# Altium PCB pcb.PcbDoc
Units mm, origin at the board's own origin, x right, y up, seen from the top; angles counter-clockwise.
Board outline 60 x 195 mm, 2 copper layers (Top Layer, Bottom Layer), stack 1.571 mm thick; 55 components, 30 nets, 192 pads, 0 vias.
Unrouted connection lines stored in the file: 111.
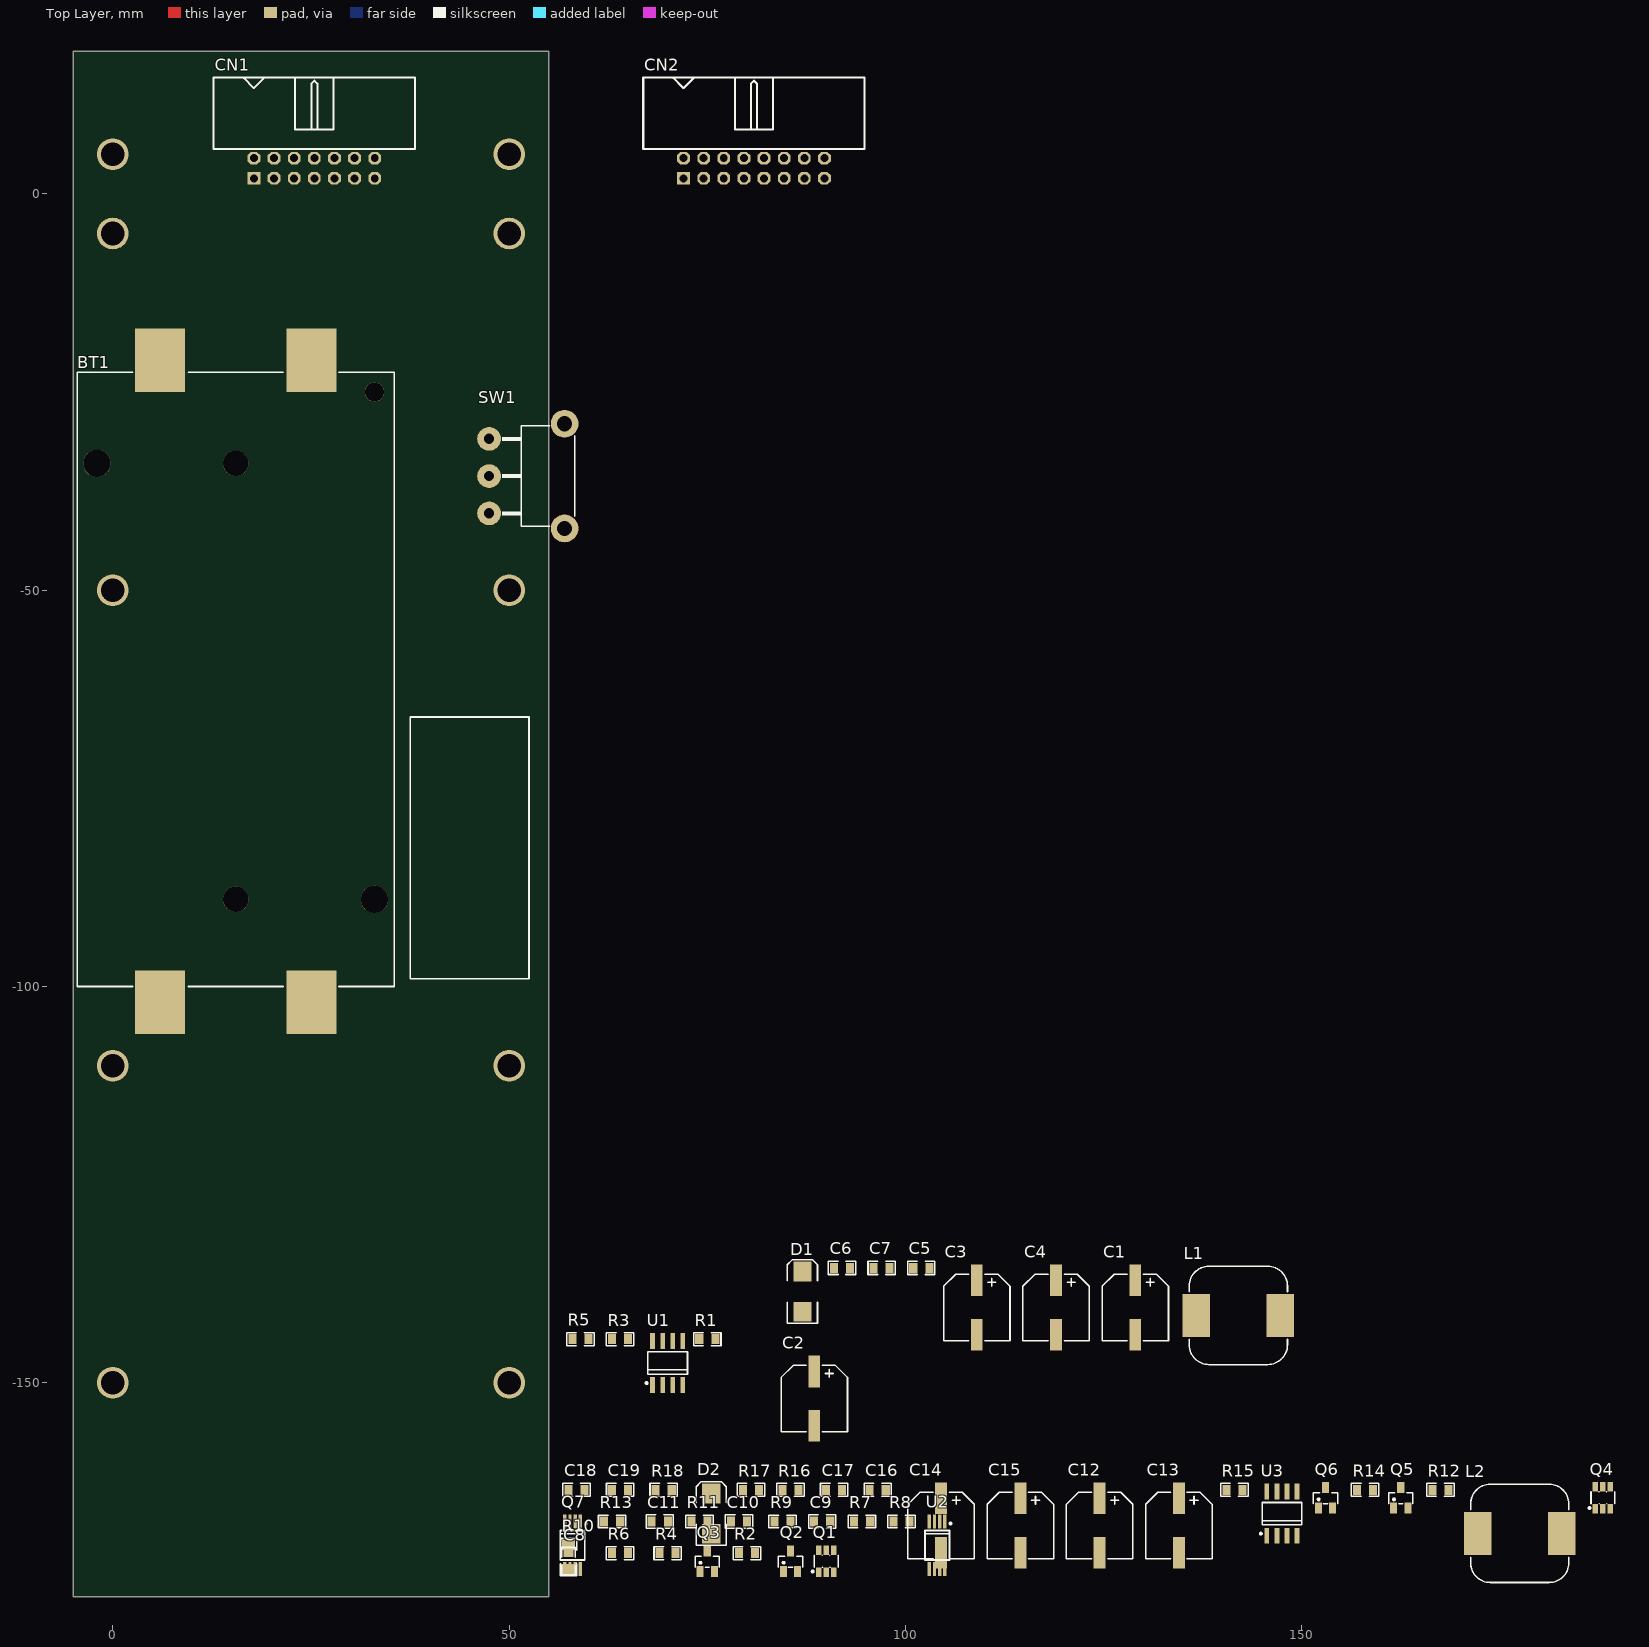
[diagram p0: Top Layer view]
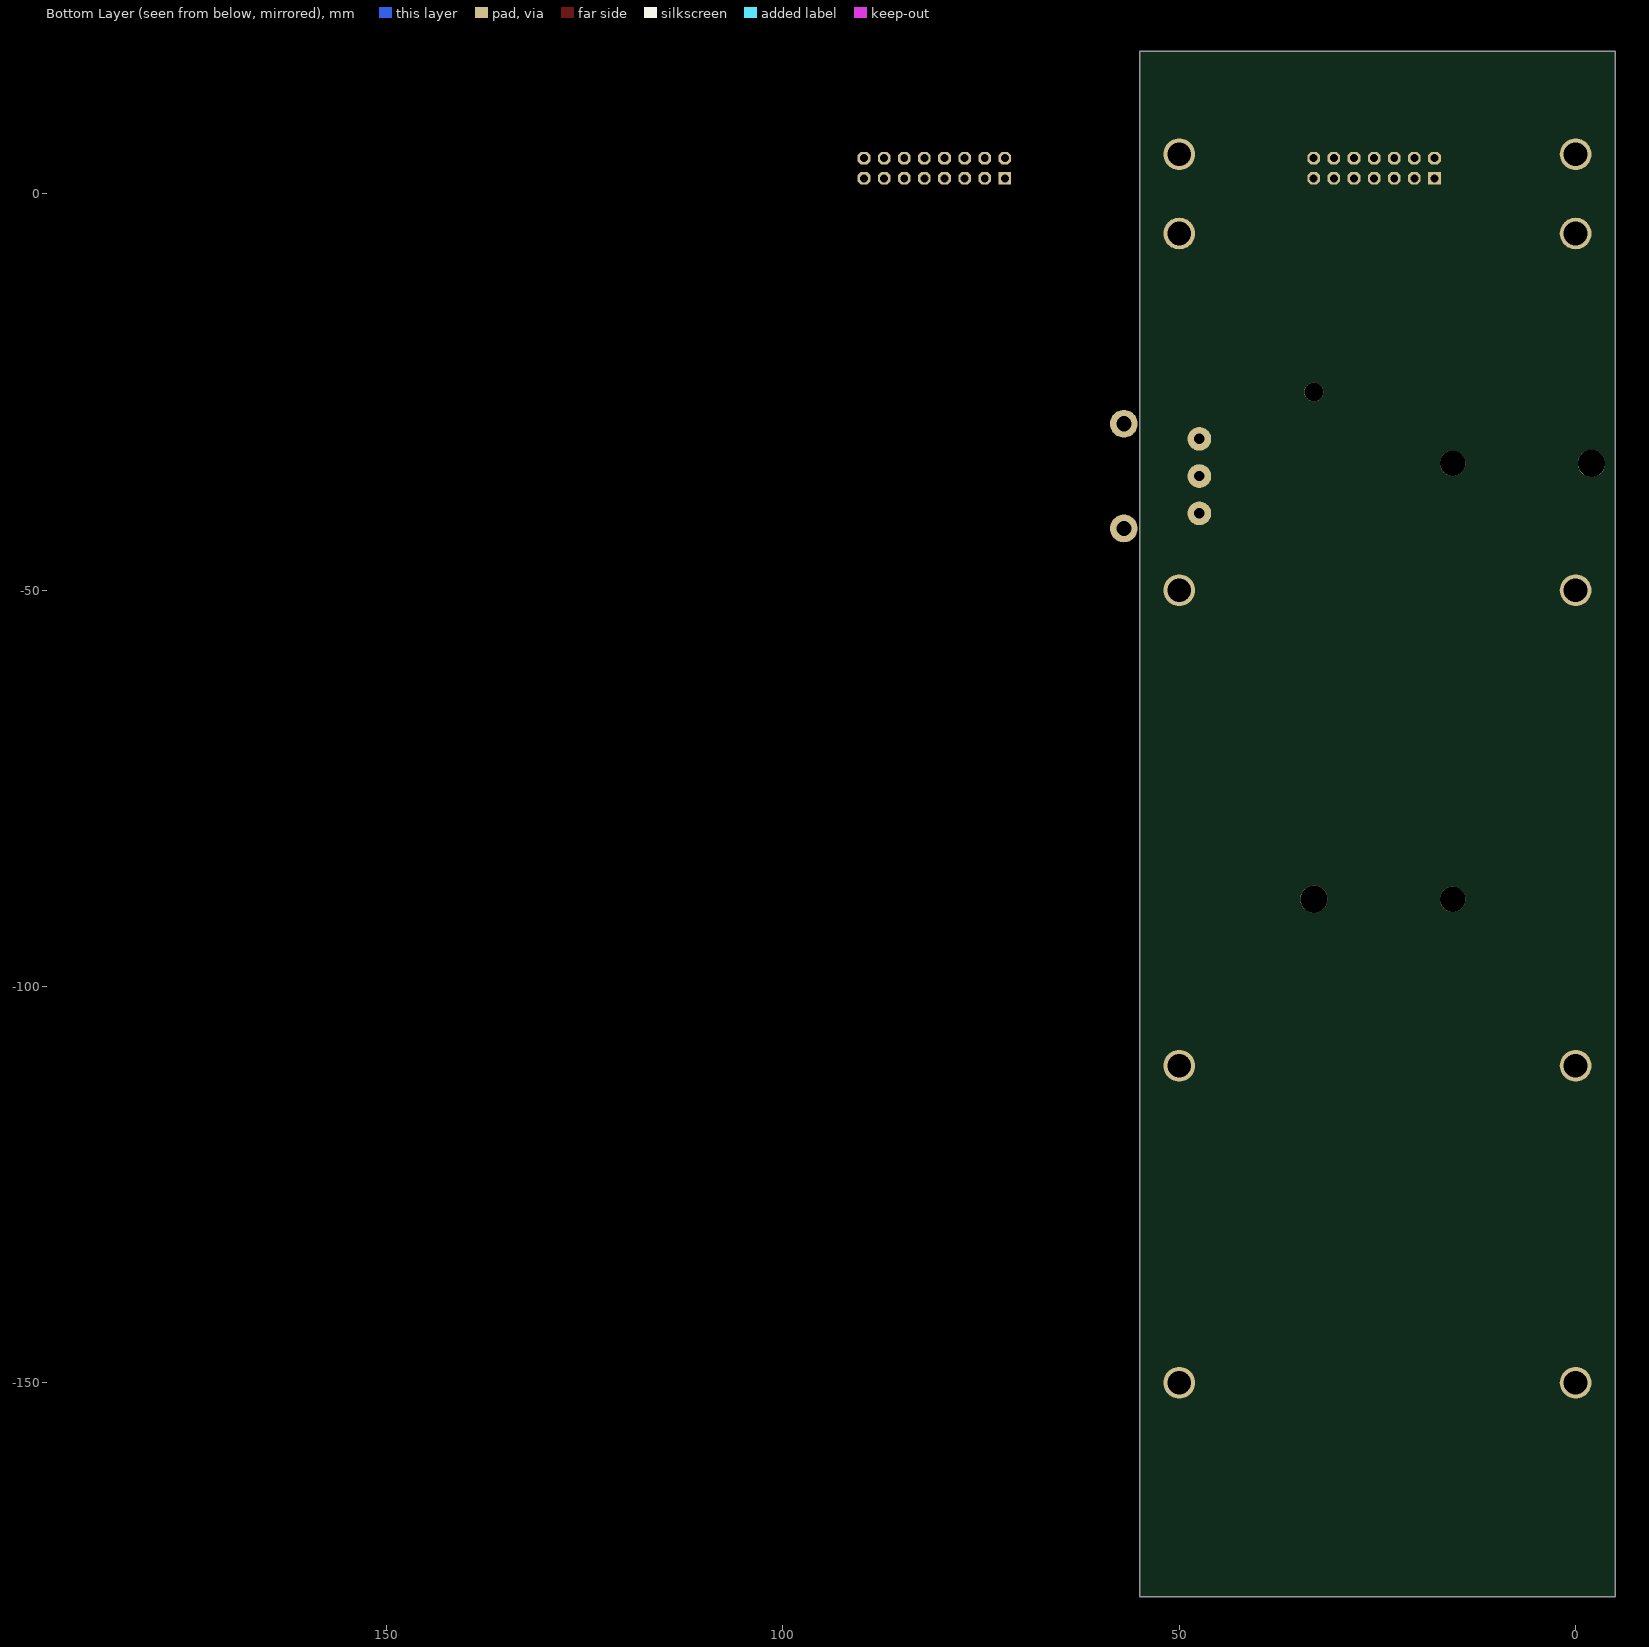
[diagram p1: Bottom Layer view, seen from below]

## Layer stack, top to bottom
Top Solder: solder mask 0.0102, Solder Resist, Dk 3.5
Top Layer: signal copper 0.0356
Dielectric 1: dielectric 1.5, FR-4, Dk 4.8
Bottom Layer: signal copper 0.0356
Bottom Solder: solder mask 0.0102, Solder Resist, Dk 3.5

## Board outline
-5,-177 -5,18 55,18 55,-177

## Design rules (kind name [scope] priority, off if disabled: settings)
Clearance [All] p1: gap=0.254 ignorepadtopadclearanceinfootprint=FALSE except(0: Arc-Hole Track-Hole SMDPad-Hole THPad-Hole Via-Hole Fill-Hole Poly-Hole Region-Hole Text-Hole)
PolygonConnect [All] p1: connectstyle=Relief reliefconductorwidth=0.254 reliefentries=4 polygonreliefangle="90 Angle" airgapwidth=0.254
RoomDefinition sch [InComponentClass('sch')] p1: confinementstyle=ConfineIn formatcopy=TRUE lockcomponents=FALSE outline -10,-160 113.26,-160 113.26,14 -10,14
RoutingVias [All] p1: holewidth=0.711 width=1.27 viastyle="Through Hole" minholewidth=0.711 minwidth=1.27 maxholewidth=0.711 maxwidth=1.27
SolderMaskExpansion [All] p1: expansion=0.102
Width [All] p1: maxlimit=0.254 minlimit=0.254 preferedwidth=0.254
30 further rules are at their usual default settings.

## Classes and differential pairs
component class sch: BT1 C1 C2 C3 C4 C5 C6 C7 C8 C12 C13 C14 C15 C16 C17 C18 C19 CN1 CN2 D1 D2 L1 L2 Q1 Q2 Q3 Q4 Q5 Q6 Q7 R1 R2 R3 R4 R5 R6 R12 R13 R14 R15 R16 R17 R18 SW1 U1 U3

## Components (designator, comment, footprint, x,y, rotation, side; value= is the part's Value field where it differs from the comment)
BT1 "KEYSTONE 1048" KEYSTONE_1048 15.505,-61.5 r90 top
C1 "220uF/16V" CES_E_8.3x8.3_6.2 129,-140.5 r0 top
C2 "220uF/16V" CES_E_8.3x8.3_6.2 88.499,-152 r0 top
C3 "220uF/16V" CES_E_8.3x8.3_6.2 109,-140.5 r0 top
C4 "220uF/16V" CES_E_8.3x8.3_6.2 119,-140.5 r0 top
C5 "100n/50V" C0805 102,-135.5 r0 top
C6 "1u/16V" C0805 92,-135.5 r0 top
C7 "2,2n/50V" C0805 97,-135.5 r0 top
C8 "6,8n/50V" C0805 57.499,-172.5 r90 top
C9 "220nF" C0805 89.499,-167.5 r0 top
C10 "220nF" C0805 78.999,-167.5 r0 top
C11 "220nF" C0805 68.999,-167.5 r0 top
C12 "220uF/16V" CES_E_8.3x8.3_6.2 124.499,-168 r0 top
C13 "220uF/16V" CES_E_8.3x8.3_6.2 134.499,-168 r0 top
C14 "220uF/16V" CES_E_8.3x8.3_6.2 104.499,-168 r0 top
C15 "220uF/16V" CES_E_8.3x8.3_6.2 114.499,-168 r0 top
C16 "100n/50V" C0805 96.499,-163.5 r0 top
C17 "1u/16V" C0805 90.999,-163.5 r0 top
C18 "2,2n/50V" C0805 58.499,-163.5 r0 top
C19 "6,8n/50V" C0805 63.999,-163.5 r0 top
CN1 "IDC Connector" IDC14_RA 17.8,1.96 r0 top
CN2 "IDC Connector" IDC16_RA 72,1.96 r0 top
D1 "MBRS140T3G" SMB 87,-138.5 r90 top
D2 "MBRS140T3G" SMB 75.499,-166.5 r90 top
L1 "10uH, 4.0A" DE1205 142,-141.5 r0 top
L2 "10uH, 4.0A" DE1205 177.499,-169 r0 top
Q1 "AO6401A" SOT-23-6 89.999,-172.5 r0 top
Q2 "BC847C" SOT-23 85.499,-172.5 r0 top
Q3 "BC857" SOT-23 74.999,-172.5 r0 top
Q4 "AO6401A" SOT-23-6 187.999,-164.5 r0 top
Q5 "BC847C" SOT-23 162.499,-164.5 r0 top
Q6 "BC857" SOT-23 152.999,-164.5 r0 top
Q7 "AO8810" TSSOP8 57.999,-170.5 r0 top
R1 "0R050" R0805 75,-144.5 r0 top
R2 "1k" R0805 79.999,-171.5 r0 top
R3 "1k7 1%" R0805 64,-144.5 r0 top
R4 "22k" R0805 69.999,-171.5 r0 top
R5 "1k 1%" R0805 59,-144.5 r0 top
R6 "1k" R0805 63.999,-171.5 r0 top
R7 "1k" R0805 94.499,-167.5 r0 top
R8 "1k" R0805 99.499,-167.5 r0 top
R9 "1k" R0805 84.499,-167.5 r0 top
R10 "0R" R1206 57.499,-172 r90 top
R11 "1k" R0805 73.999,-167.5 r0 top
R12 "0R050" R0805 167.499,-163.5 r0 top
R13 "4M7" R0805 62.999,-167.5 r0 top
R14 "1k" R0805 157.999,-163.5 r0 top
R15 "3k0 1%" R0805 141.499,-163.5 r0 top
R16 "22k" R0805 85.499,-163.5 r0 top
R17 "1k 1%" R0805 80.499,-163.5 r0 top
R18 "1k" R0805 69.499,-163.5 r0 top
SW1 "SL19123" 500SSPxS1M6xEA 47.47,-35.605 r90 top
U1 "NCP3063BDR2G" SO8 70,-147.5 r0 top
U2 "S-8232" TSSOP8 103.999,-170.5 r0 top
U3 "NCP3063BDR2G" SO8 147.499,-166.5 r0 top

## Footprints (in the part's own frame and the unit in brackets; to place one, negate y for a bottom-side part, rotate by r counter-clockwise, add the part's x,y. Pads: shape width x height; smd on the part's side, far side on the other; paste and mask are expansions set on the pad)
500SSPxS1M6xEA [mm] "E-Switch 500 Series Miniature Slide Switche (TME: Canal Electronic, SL19123)"
  round 3 hole 1.3: 1(-4.7,0) 2(0,0) 3(4.7,0)
  round 3.5 hole 1.9: M(-6.605,-9.53) M(6.605,-9.53)
  silkscreen extent -6.35,-10.79 6.35,-1.65, body extent -6.78,-15.49 6.79,0.7, height 6.8
C0805 [mil]
  rect 40x50 smd: 1(-40,0) 2(40,0)
  silkscreen extent -68,-33 68,33, body extent -39,-25 39,25, height 31
CES_E_8.3x8.3_6.2 [mm] "SMT Aluminum Electrolytic Capacitor, E Size; base: 8.3x8.3mm, height: 6.2mm"
  rect 1.5x4 smd: 1(0,3.429) 2(0,-3.429)
  silkscreen extent -4.19,-4.19 4.19,4.19, body extent -4.15,-4.5 4.15,4.5, height 6.2
DE1205 [mm] "FERROCORE DE1205 (12x12mm)"
  rect 3.5x5.4 smd: 1(5.3,0) 2(-5.3,0)
  silkscreen extent -6.2,-6.2 6.2,6.2, body extent -6.15,-6.15 6.15,6.15, height 6.2
IDC14_RA [mm] "2.54mm, 14 Pin IDC Male Connector, Right Angle"
  rect 1.6x1.6 hole 1: 1(0,0)
  oct 1.6x1.6 hole 1: 2(0,2.54) 3(2.54,0) 4(2.54,2.54) 5(5.08,0) 6(5.08,2.54) 7(7.62,0) 8(7.62,2.54) 9(10.16,0) 10(10.16,2.54) 11(12.7,0) 12(12.7,2.54) 13(15.24,0) 14(15.24,2.54)
  silkscreen extent -5.08,3.68 20.32,12.7, body extent -5.08,-0.28 20.32,12.67, height 9.46
IDC16_RA [mm] "2.54mm, 16 Pin IDC Male Connector, Right Angle"
  rect 1.6x1.6 hole 1: 1(0,0)
  oct 1.6x1.6 hole 1: 2(0,2.54) 3(2.54,0) 4(2.54,2.54) 5(5.08,0) 6(5.08,2.54) 7(7.62,0) 8(7.62,2.54) 9(10.16,0) 10(10.16,2.54) 11(12.7,0) 12(12.7,2.54) 13(15.24,0) 14(15.24,2.54) 15(17.78,0) 16(17.78,2.54)
  silkscreen extent -5.08,3.68 22.86,12.7, body extent -5.08,-0.25 22.86,12.7, height 9.46
KEYSTONE_1048 [mm] "SMT double 18650 LiPo Holder"
  rect 8x6.35 smd: 1(-40.5,9.555) 2(40.5,9.555) 3(-40.5,-9.555) 4(40.5,-9.555)
  round 3.2 hole 3.2: M1(-27.5,0) M2(27.5,0)
  round 3.45 hole 3.45: M3(-27.5,-17.505) M4(27.5,17.505)
  round 2.4 hole 2.4: M5(36.5,-17.505)
  silkscreen extent -38.5,-20 39,20, body extent -42.88,-19.9 43.07,19.88, height 14.88
R0805 [mil]
  rect 40x50 smd: 1(-40,0) 2(40,0)
  silkscreen extent -68,-32 68,32, body extent -39,-25 39,25, height 31
R1206 [mil]
  rect 50x65 smd: 1(-60,0) 2(60,0)
  silkscreen extent -93,-40 93,40, body extent -63,-31 63,32, height 39
SMB [mm]
  rect 2.5x2.3 smd: 1(-2.54,0) 2(2.54,0)
  silkscreen extent -4,-1.9 4,1.9, body extent -2.7,-1.8 2.7,1.8, height 2.3
SO8 [mm] "Small Outline; 8 Leads; Body Width 3.7 mm; Pitch 1.27 mm"
  rect 0.6x2 smd: 1(-1.905,-2.794) 2(-0.635,-2.794) 3(0.635,-2.794) 4(1.905,-2.794) 5(1.905,2.794) 6(0.635,2.794) 7(-0.635,2.794) 8(-1.905,2.794)
  silkscreen extent -2.79,-2.66 2.5,1.4, body extent -2.4,-2.9 2.4,2.9, height 1.75
SOT-23 [mm]
  rect 0.9x1.4 smd: 1(-0.9,-1.3) 2(0.9,-1.3) 3(0,1.3)
  silkscreen extent -1.52,-0.76 1.52,0.64, body extent -1.46,-1.25 1.46,1.23, height 1
SOT-23-6 [mm] "SOT23-6, AKA: SOT-26 (Diodes), SuperSOT-6 (Fairchild), SOT753 (NXP), TSOP5 (NXP)"
  rect 0.7x1.2 smd: 1(-0.95,-1.4) 2(0,-1.4) 3(0.95,-1.4) 4(0.95,1.4) 5(0,1.4) 6(-0.95,1.4)
  silkscreen extent -1.82,-1.42 1.5,0.76, body extent -1.4,-1.21 1.4,1.21, height 1.09
TSSOP8 [mm] "JEDEC MO-153 AA (TSSOP-8)"
  rect 0.42x1.78 smd: 1(0.975,3) 2(0.325,3) 3(-0.325,3) 4(-0.975,3) 5(-0.975,-3) 6(-0.325,-3) 7(0.325,-3) 8(0.975,-3)
  silkscreen extent -1.55,-1.88 1.8,2.87, body extent -1.5,-3.23 1.5,3.23, height 1.2

## Part data
BT1: library part 18650_x2, "2x 18650 LiPo Acu in the KEYSTONE 1048 Holder", Published=14-Sep-2006
C1 C2 C3 C4 C12 C13 C14 C15: library part "Cap Pol", "Polarized Capacitor", ComponentLink1Description=datasheet, ComponentLink2Description=supplier
C5 C6 C7 C8 C9 C10 C11 C16 C17 C18 C19: library part Cap, "Capacitor", ComponentLink1Description=datasheet, ComponentLink2Description=supplier
CN1: library part CN_7x2
CN2: library part CN_8x2
D1 D2: "Schottky barrier rectifier: 40V, 1A", PackageReference=SMB, Published=22-Nov-2006, Supplier 1=TME, Supplier 2=Farnell, Supplier Part Number 1=MBRS140T3G, Supplier Part Number 2=1467526
L1 L2: library part DE1205-10, "DE1205-10", ComponentLink1Description=datasheet, ComponentLink2Description=supplier, Published=08-Mar-2006, Supplier 1=TME, Supplier Part Number 1=DE1205-10
Q1 Q4: "P-Channel MOSFET; -60V, -5A, 1.3W;", Supplier 1=TME, Supplier Part Number 1=AO6401A
Q2 Q5: "NPN General Purpose Transistor (VCE=45V, IC=100mA, HFE=420-800)", PowerRating=250mW, Supplier Part Number 1=1081235, Supplier Part Number 11=BC847C-DIO, Supplier Part Number 12=BC847C.215, HFE=420-800, IC=100mA, Supplier 1=Farnell, Supplier 2=Mouser, Supplier 3=Farnell, Supplier 4=Farnell, Supplier 5=Farnell, Supplier 6=Farnell, Supplier 7=Farnell, Supplier 8=Farnell, Supplier 9=Farnell, Supplier 10=TME, Supplier 11=TME, Supplier 12=TME, Supplier Part Number 2=512-BC847CMTF, Supplier Part Number 3=2319372, Supplier Part Number 4=1081235RL, Supplier Part Number 5=1574344RL, Supplier Part Number 6=1574344, Supplier Part Number 7=2317857, Supplier Part Number 8=1459038RL, Supplier Part Number 9=1459038, Supplier Part Number 10=BC847C, VCEO=45V
Q3 Q6: "PNP General Purpose Transistor (VCE=-45V, IC=-100mA)"
Q7: "Dual Common Drain N-Channel MOSFET: Vds=20V, Rdson<20mR@4,5V, Id=7A", Package Reference="TSOP6 (SOT23-6)", Published=20-Mar-2006, Supplier 1=TME, Supplier Part Number 1=AO8810
R1 R2 R3 R4 R5 R6 R7 R8 R9 R10 R11 R12 R13 R14 R15 R16 R17 R18: library part Res, "Resistor", ComponentLink1Description=datasheet, ComponentLink2Description=supplier, Published=19-Feb-2006
SW1: "Canal Electronic SPDT AC: 3A/250V, DC: 6A/28V", Supplier 1=TME, Supplier Part Number 1=SL19123
U1 U3: "DC-DC Converter NCP3063BDR2G (Farnell 1547126)", Supplier Part Number 1=1547126, PackageReference=SO8, Published=22-Nov-2006, Supplier 1=Farnell, Supplier 2=Farnell, Supplier 3=Farnell, Supplier Part Number 2=2126136, Supplier Part Number 3=1547126RL
U2: "Battery Protection IC For 2-Serial-Cell Pack"

## Free pads (board coordinates)
  round 4 hole 3: 2(0,-150) 2(0,-110) 2(0,-50) 2(0,-5) 2(0,5) 2(50,-150) 2(50,-110) 2(50,-50) 2(50,-5) 2(50,5)

## Nets (pads, with @x,y where several pads share a name; then routed paths per layer and width w, separated by ;. In a path a pad name is that pad's centre, name@x,y a point inside that pad or via, vN(x,y) a via of type N, cw(c..) or ccw(c..) an arc to the next point about the centre after c; other vN are vias at no path point)
3V3: C3.1 C4.1 C5.2 L1.2 R3.2
5V0: C14.1 C15.1 C16.2 L2.2 R10.2 R15.2
7V2: C1.1 C2.1 C6.2 C12.1 C13.1 C17.2 R1.1 R10.1 R12.1 SW1.3 U1.6 U3.6
FB: R3.1 R5.1 R15.1 R17.1 U1.5 U3.5
GND: C1.2 C2.2 C3.2 C4.2 C5.1 C6.1 C7.1 C8.1 C12.2 C13.2 C14.2 C15.2 C16.1 C17.1 C18.1 C19.1 D1.1 D2.1 Q7.6 Q7.7 R5.2 R6.2 R11.2 R13.2 R17.2 R18.2 SW1.M U1.4 U3.4
NetBT1_1: BT1.1 R7.1 R8.2 SW1.2
NetBT1_2: BT1.2 BT1.4 R9.1
NetC7_2: C7.2 R4.2 U1.3
NetC8_2: C8.2 R6.1 U1.2
NetC9_1: C9.1 C10.2 R9.2 U2.7
NetC9_2: C9.2 R7.2 U2.8
NetC11_2: C11.2 U2.6
NetC18_2: C18.2 R16.2 U3.3
NetC19_2: C19.2 R18.1 U3.2
NetD1_2: D1.2 L1.1 Q1.1 Q1.2 Q1.5 Q1.6 R4.1
NetD2_2: D2.2 L2.1 Q4.1 Q4.2 Q4.5 Q4.6 R16.1
NetQ1_3: Q1.3 Q2.2 Q3.2
NetQ1_4: Q1.4 Q2.3 R1.2 R2.1 U1.7
NetQ2_1: Q2.1 Q3.1
NetQ3_3: Q3.3 R2.2 U1.1
NetQ4_3: Q4.3 Q5.2 Q6.2
NetQ4_4: Q4.4 Q5.3 R12.2 R14.1 U3.7
NetQ5_1: Q5.1 Q6.1
NetQ6_3: Q6.3 R14.2 U3.1
NetQ7_1: Q7.1 Q7.8
NetQ7_4: Q7.4 U2.2
NetQ7_5: Q7.5 R13.1 U2.3
NetR8_1: R8.1 U2.1
NetR11_1: R11.1 U2.4
PACK_GND: BT1.3 C10.1 C11.1 Q7.2 Q7.3 U2.5
pads on no net: BT1.M1 BT1.M2 BT1.M3 BT1.M4 BT1.M5 CN1.1 CN1.2 CN1.3 CN1.4 CN1.5 CN1.6 CN1.7 CN1.8 CN1.9 CN1.10 CN1.11 CN1.12 CN1.13 CN1.14 CN2.1 CN2.2 CN2.3 CN2.4 CN2.5 CN2.6 CN2.7 CN2.8 CN2.9 CN2.10 CN2.11 CN2.12 CN2.13 CN2.14 CN2.15 CN2.16 SW1.1 U1.8 U3.8

## Other copper
Top Layer:
  text "szerokosc plyty 60mm" at -60.61,-10.534 h1.52
  text "raster otworow 5mm, fi 3mm" at -60.61,-15.36 h1.52
  text "11 rzedow otworow po szerokosci" at -60,-19 h1.52
  text "wysokosc przekladni 24mm" at -60,-22 h1.52
  text "uchylne na zawiasie przedniej osi" at -79,-34 h1.52

## Silkscreen, mask and mechanical layers (free items; w line width, h text height)
Top Overlay:
  lines w0.2: 37.5,-99 52.5,-99 52.5,-66 37.5,-66 37.5,-99
Mechanical 1:
  text "TConnector na zasilanie z baterii" at -64,-43 h1.52
  text "odcięcie zasilania na przełączniku" at -62,-47 h1.52
Mechanical 2:
  circle w0.2: c50,-10 r0.707
  circle w0.2: c50,0 r0.707
  circle w0.2: c50,-130 r0.707
  circle w0.2: c0,-130 r0.707
  circle w0.2: c0,-10 r0.707
  circle w0.2: c0,0 r0.707
  lines w0.2: -5,-155 -5,5 55,5 55,-155 -5,-155
Mechanical 3:
  lines w0.254: -5,-177 55,-177 55,-15.5 55,18 -5,18 -5,-15.5 -5,-177
  text "koniec gasiennic" at 99,16 h1.52
  text "koniec gasiennic" at 99,-154 h1.52